# Altium PCB Voltage_Detect_Karen.PcbDoc
Units mm, origin at the board's own origin, x right, y up, seen from the top; angles counter-clockwise.
Board outline 112 x 59 mm, 2 copper layers (Top Layer, Bottom Layer); 87 components, 62 nets, 238 pads, 65 vias.
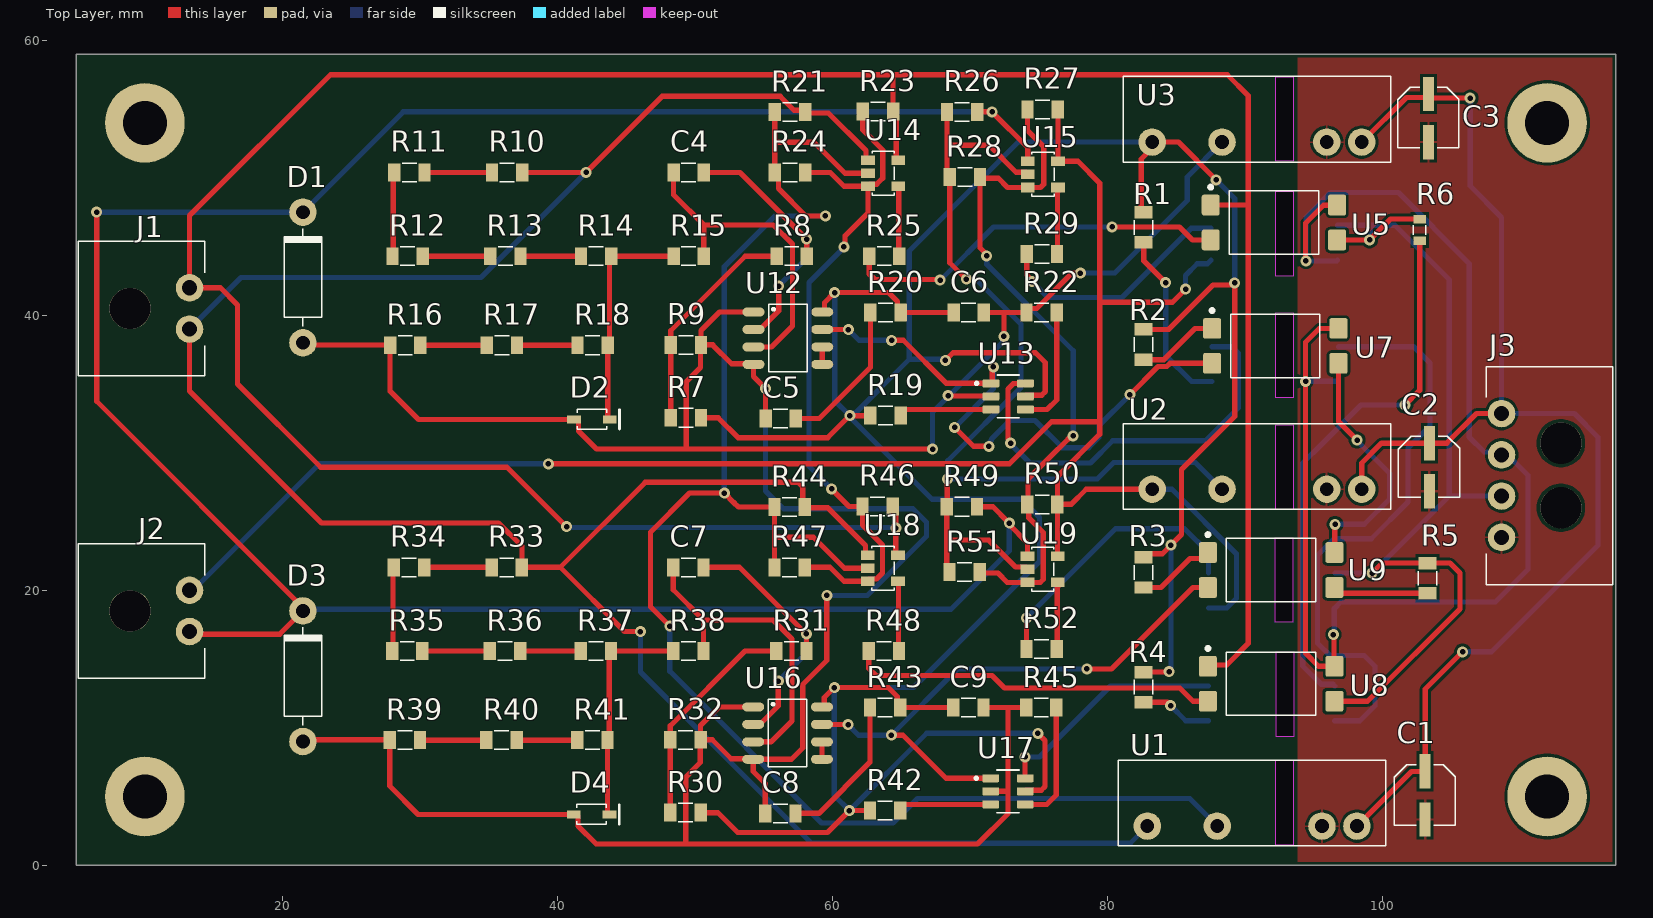
[diagram p0: Top Layer view]
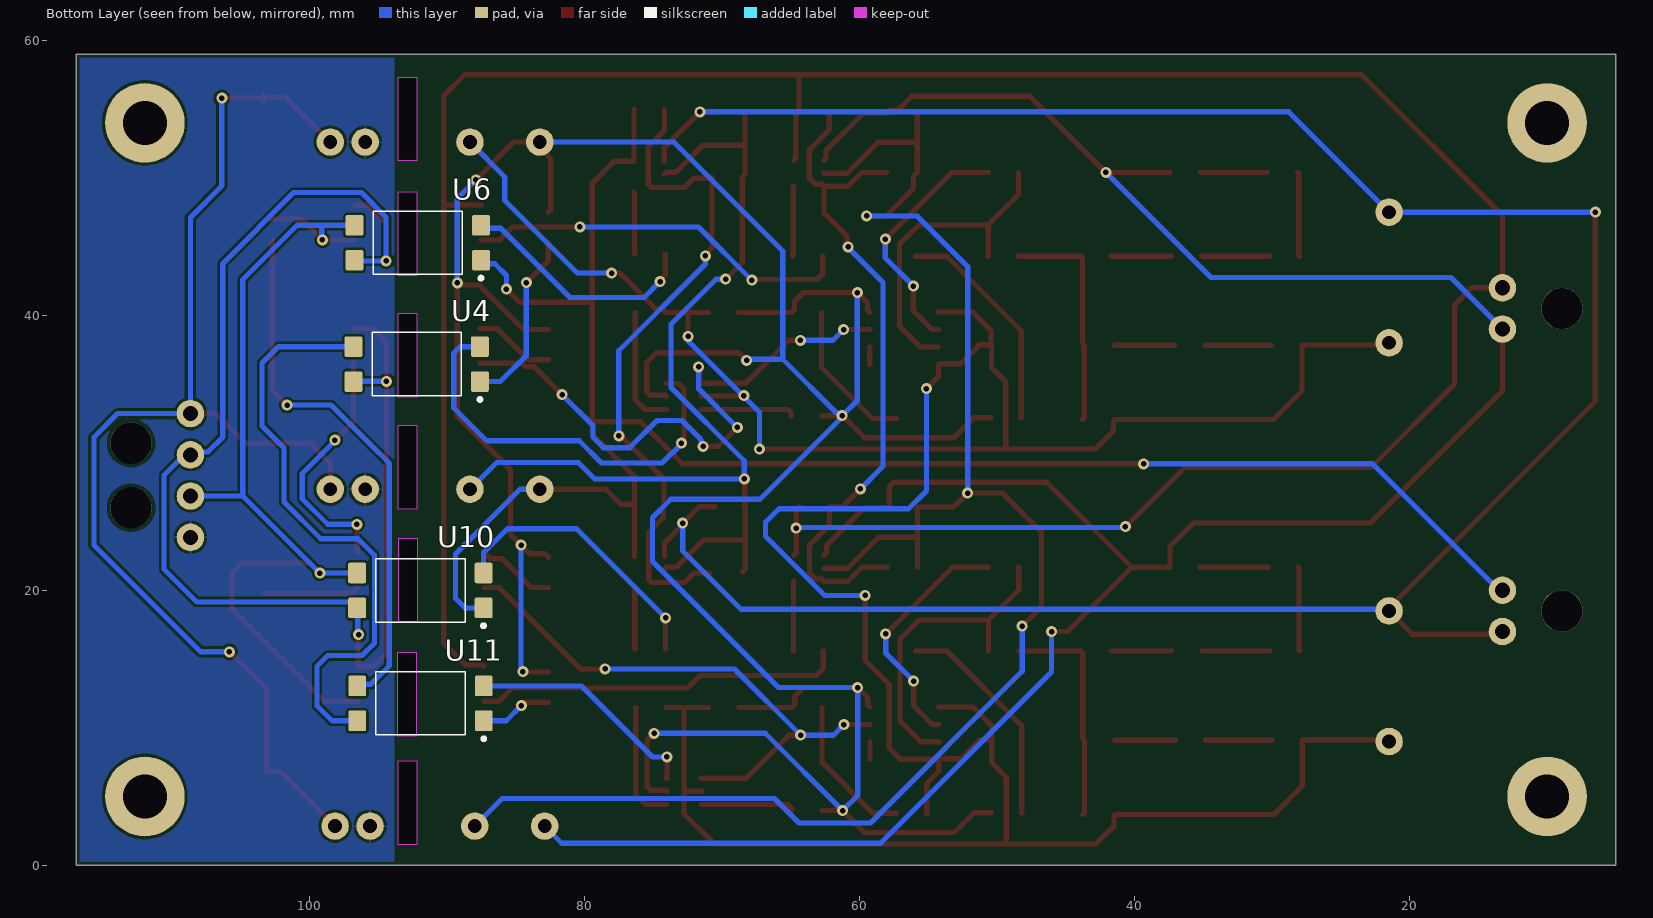
[diagram p1: Bottom Layer view, seen from below]
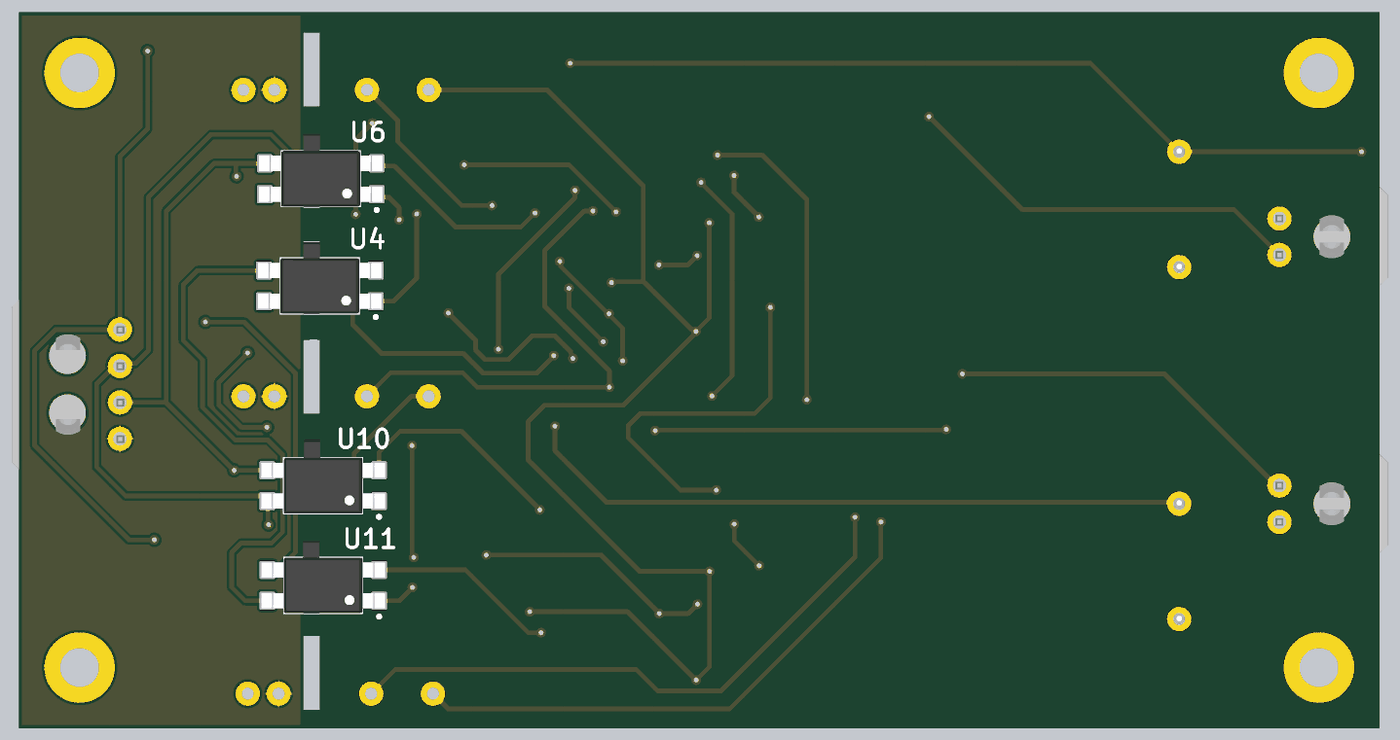
[diagram p2: 3D render of the assembled board from below, using the file's embedded part models]

## Layer stack, top to bottom
Top Solder: solder mask 0.0102, Solder Resist, Dk 3.5
Top Layer: signal copper 0.0356
Dielectric 1: dielectric 0.32, FR-4, Dk 4.8
Bottom Layer: signal copper 0.0356
Bottom Solder: solder mask 0.0102, Solder Resist, Dk 3.5

## Board outline
5,0 5,59 117,59 117,0
cut-out: 92.175,17.7 93.525,17.7 93.525,23.8 92.175,23.8
cut-out: 92.25,9.375 93.6,9.375 93.6,15.475 92.25,15.475
cut-out: 92.225,1.5 93.575,1.5 93.575,7.6 92.225,7.6
cut-out: 92.225,25.9 93.575,25.9 93.575,32 92.225,32
cut-out: 92.225,34.05 93.575,34.05 93.575,40.15 92.225,40.15
cut-out: 92.225,42.875 93.575,42.875 93.575,48.975 92.225,48.975
cut-out: 92.225,51.225 93.575,51.225 93.575,57.325 92.225,57.325

## Design rules (kind name [scope] priority, off if disabled: settings)
AcuteAngle [All] p1: minimum=3.50000000000000E+0001 checktracksonly=FALSE
BoardOutlineClearance "BoardOutlineClearance 1" [All] p1: gap=0.25 ignorepadtopadclearanceinfootprint=FALSE except(0: Arc-SplitContinuation Track-SplitContinuation SMDPad-SplitContinuation THPad-SplitContinuation Via-SplitContinuation Fill-SplitContinuation Poly-SplitContinuation Region-SplitContinuation Text-SplitContinuation) // Milling
Clearance "Clearance-1 1/2 Oz" [All] p1: gap=0.125 ignorepadtopadclearanceinfootprint=FALSE except(0.2: Arc-Fill Arc-Poly Track-Fill Track-Poly SMDPad-SMDPad SMDPad-Fill SMDPad-Poly THPad-Fill THPad-Poly Via-Fill Via-Poly Fill-Fill Fill-Poly Poly-Poly Poly-Region Poly-Text; 0.25: Arc-Hole Track-Hole SMDPad-Hole THPad-Hole Via-Hole Fill-Hole Poly-Hole Region-Hole Text-Hole) // Standart
ComponentClearance [All] p1: gap=0.1 collisioncheckmode=3 verticalgap=0.1 showdistances=FALSE
DiffPairsRouting "DiffPairsRouting 1/2 Oz" [All] p1: maxlimit=0.254 minlimit=0.125 mostfreqgap=0.254 toplayer_minwidth=0.125 toplayer_maxwidth=0.381 toplayer_prefwidth=0.381 bottomlayer_minwidth=0.125 bottomlayer_maxwidth=0.381 bottomlayer_prefwidth=0.381 maxuncoupledlength=12.7
HoleSize "Minimum HoleSize" [IsPad] p1: absolutevalues=TRUE maxlimit=5.9 minlimit=0.6 maxpercent=80.000 minpercent=20.000
HoleSize "Minimum HoleSize VIA 1" [IsVia] p2: absolutevalues=TRUE maxlimit=5.9 minlimit=0.3 maxpercent=80.000 minpercent=20.000 // Standart
HoleToHoleClearance Hole2HoleClearance [All] p1: gap=0.25 allowstackedmicrovias=FALSE
MinimumAnnularRing "Minimum AR VIA Standart" [All] p1: minimumring=0.15
MinimumAnnularRing "Minimum AR PAD Standart" [All] p2: minimumring=0.2
MinimumSolderMaskSliver "SolderMask Bridge Standart" [All] p1: minsoldermaskwidth=0.15 // All Masks
PlaneClearance "PlaneClearance-1 1/2 Oz" [All] p1: clearance=0.2 // Standart
PlaneConnect "TermalConnect-1 1/2 Oz" [All] p1: planeconnectstyle=Relief reliefexpansion=0.2 reliefentries=4 reliefconductorwidth=0.2 reliefairgap=0.2 // Standart
PolygonConnect "PolygonConnect-1 1/2 Oz" [All] p1: thpad.connectstyle=Relief thpad.reliefconductorwidth=0.15 thpad.reliefentries=4 thpad.polygonreliefangle="90 Angle" thpad.airgapwidth=0.2 smdpad.connectstyle=Relief smdpad.reliefconductorwidth=0.2 smdpad.reliefentries=4 smdpad.polygonreliefangle="90 Angle" smdpad.airgapwidth=0.2 via.connectstyle=Direct via.reliefconductorwidth=0.254 via.reliefentries=4 via.polygonreliefangle="90 Angle" via.airgapwidth=0.254 // Standart
RoomDefinition Primary [InComponentClass('Primary')] p1: confinementstyle=ConfineIn formatcopy=TRUE lockcomponents=FALSE outline 17.585,29.21 80.608,29.21 80.608,56.407 17.585,56.407
RoomDefinition Secondary [InComponentClass('Secondary')] p2: confinementstyle=ConfineIn formatcopy=TRUE lockcomponents=FALSE outline 17.56,0.485 80.583,0.485 80.583,27.682 17.56,27.682
RoutingCorners [All] p1 off: cornerstyle=45-Degree minsetback=2.54 maxsetback=2.54
RoutingVias [All] p1: holewidth=0.4 width=0.8 viastyle="Through Hole" minholewidth=0.3 minwidth=0.6 maxholewidth=5.9 maxwidth=8.9
SilkToSilkClearance Silk2SilkClearance [All] p1 off: silktosilkclearance=0.15
SilkToSolderMaskClearance Silk2SolderMaskClearance [IsPad] p1 off: minsilkscreentomaskgap=0.15 clearancetoexposedcopper=TRUE
SolderMaskExpansion SolderMaskExpansion-1 [All] p1: expansion=0.05 istentingtop=FALSE // Standart
UnRoutedNet [All] p1: checkbadconnections=TRUE
Width "Width 1/2 Oz" [All] p1: maxlimit=10 minlimit=0.125 preferedwidth=0.254 checkconnectedcopper=TRUE
19 further rules are at their usual default settings.

## Classes and differential pairs
channel class "Voltage detectV2": Primary Secondary
component class Sheet1: C1 C2 C3 J1 J2 J3 R1 R2 R3 R4 R5 R6 U1 U2 U3 U4 U5 U6 U7 U8 U9 U10 U11
component class Secondary: C7 C8 C9 D3 D4 R30 R31 R32 R33 R34 R35 R36 R37 R38 R39 R40 R41 R42 R43 R44 R45 R46 R47 R48 R49 R50 R51 R52 U16 U17 U18 U19
component class Primary: C4 C5 C6 D1 D2 R7 R8 R9 R10 R11 R12 R13 R14 R15 R16 R17 R18 R19 R20 R21 R22 R23 R24 R25 R26 R27 R28 R29 U12 U13 U14 U15

## Components (designator, comment, footprint, x,y, rotation, side; value= is the part's Value field where it differs from the comment)
C1 "4.7uF" "Bar Cap 4x5.4" 103.125,3.325 r180 top (schematic designator C5)
C2 "4.7uF" "Bar Cap 4x5.4" 103.425,27.2 r180 top (schematic designator C6)
C3 "4.7uF" "Bar Cap 4x5.4" 103.375,52.6 r180 top (schematic designator C4)
C4 "10nF" "0805 Capicator" 49.559,50.395 r0 top (schematic designator C1)
C5 "0.1uF" "0805 Capicator" 56.25,32.5 r180 top (schematic designator C2)
C6 "0.1uF" "0805 Capicator" 69.925,40.2 r0 top (schematic designator C3)
C7 "10nF" "0805 Capicator" 49.534,21.67 r0 top (schematic designator C1)
C8 "0.1uF" "0805 Capicator" 56.225,3.775 r180 top (schematic designator C2)
C9 "0.1uF" "0805 Capicator" 69.9,11.475 r0 top (schematic designator C3)
D1 "Diode" DO-41 21.5,38 r90 top
D2 "Zener 12V" sod-323 41.225,32.425 r0 top
D3 "Diode" DO-41 21.5,9 r90 top (schematic designator D1)
D4 "Zener 12V" sod-323 41.2,3.7 r0 top (schematic designator D2)
J1 "Conn2x1" "MolexMicroFit 2x1" 13.25,42 r270 top
J2 "Conn2x1" "MolexMicroFit 2x1" 13.25,20 r270 top
J3 "Conn4x1" "MolexMicroFit 4x1" 108.68,32.85 r90 top
R1 "100R" "0805 Resistor" 82.65,46.4 r90 top (schematic designator R15)
R2 "100R" "0805 Resistor" 82.65,37.875 r90 top (schematic designator R3)
R3 "100R" "0805 Resistor" 82.65,21.3 r90 top (schematic designator R16)
R4 "100R" "0805 Resistor" 82.65,12.95 r90 top (schematic designator R17)
R5 "1k" "0805 Resistor" 103.3,20.875 r90 top (schematic designator R27)
R6 "2.4k" "0603 Resistor" 102.725,46.2 r90 top (schematic designator R28)
R7 "75k" "0805 Resistor" 49.35,32.55 r180 top (schematic designator R1)
R8 "100R" "0805 Resistor" 57.052,44.299 r0 top (schematic designator R2)
R9 "200k" "0805 Resistor" 49.35,37.85 r180 top (schematic designator R4)
R10 "200k" "0805 Resistor" 36.351,50.395 r180 top (schematic designator R5)
R11 "200k" "0805 Resistor" 29.239,50.395 r180 top (schematic designator R6)
R12 "200k" "0805 Resistor" 29.112,44.299 r0 top (schematic designator R7)
R13 "200k" "0805 Resistor" 36.224,44.299 r0 top (schematic designator R8)
R14 "200k" "0805 Resistor" 42.828,44.299 r0 top (schematic designator R9)
R15 "100R" "0805 Resistor" 49.559,44.299 r0 top (schematic designator R10)
R16 "2.4k" "0805 Resistor" 28.942,37.822 r0 top (schematic designator R11)
R17 "24k" "0805 Resistor" 35.97,37.822 r180 top (schematic designator R12)
R18 "24k" "0805 Resistor" 42.574,37.822 r0 top (schematic designator R13)
R19 "1k" "0805 Resistor" 63.875,32.7 r180 top (schematic designator R18)
R20 "1k" "0805 Resistor" 63.875,40.2 r180 top (schematic designator R14)
R21 "1k" "0805 Resistor" 56.925,54.775 r0 top (schematic designator R19)
R22 "1k" "0805 Resistor" 75.225,40.2 r0 top (schematic designator R29)
R23 "1k" "0805 Resistor" 63.325,54.825 r0 top (schematic designator R20)
R24 "1k" "0805 Resistor" 56.925,50.395 r0 top (schematic designator R21)
R25 "1k" "0805 Resistor" 63.783,44.299 r180 top (schematic designator R22)
R26 "1k" "0805 Resistor" 69.45,54.8 r0 top (schematic designator R23)
R27 "1k" "0805 Resistor" 75.3,54.975 r0 top (schematic designator R24)
R28 "1k" "0805 Resistor" 69.65,50.05 r0 top (schematic designator R25)
R29 "1k" "0805 Resistor" 75.25,44.45 r180 top (schematic designator R26)
R30 "75k" "0805 Resistor" 49.325,3.825 r180 top (schematic designator R1)
R31 "100R" "0805 Resistor" 57.027,15.574 r0 top (schematic designator R2)
R32 "200k" "0805 Resistor" 49.325,9.125 r180 top (schematic designator R4)
R33 "200k" "0805 Resistor" 36.326,21.67 r180 top (schematic designator R5)
R34 "200k" "0805 Resistor" 29.214,21.67 r180 top (schematic designator R6)
R35 "200k" "0805 Resistor" 29.087,15.574 r0 top (schematic designator R7)
R36 "200k" "0805 Resistor" 36.199,15.574 r0 top (schematic designator R8)
R37 "200k" "0805 Resistor" 42.803,15.574 r0 top (schematic designator R9)
R38 "100R" "0805 Resistor" 49.534,15.574 r0 top (schematic designator R10)
R39 "2.4k" "0805 Resistor" 28.917,9.097 r0 top (schematic designator R11)
R40 "24k" "0805 Resistor" 35.945,9.097 r180 top (schematic designator R12)
R41 "24k" "0805 Resistor" 42.549,9.097 r0 top (schematic designator R13)
R42 "1k" "0805 Resistor" 63.85,3.975 r180 top (schematic designator R18)
R43 "1k" "0805 Resistor" 63.85,11.475 r180 top (schematic designator R14)
R44 "1k" "0805 Resistor" 56.9,26.05 r0 top (schematic designator R19)
R45 "1k" "0805 Resistor" 75.2,11.475 r0 top (schematic designator R29)
R46 "1k" "0805 Resistor" 63.3,26.1 r0 top (schematic designator R20)
R47 "1k" "0805 Resistor" 56.9,21.67 r0 top (schematic designator R21)
R48 "1k" "0805 Resistor" 63.758,15.574 r180 top (schematic designator R22)
R49 "1k" "0805 Resistor" 69.425,26.075 r0 top (schematic designator R23)
R50 "1k" "0805 Resistor" 75.275,26.25 r0 top (schematic designator R24)
R51 "1k" "0805 Resistor" 69.625,21.325 r0 top (schematic designator R25)
R52 "1k" "0805 Resistor" 75.225,15.725 r180 top (schematic designator R26)
U1 "DC/DC" "SIP7 TMV" 80.77,1.62 r270 top
U2 "DC/DC" "SIP7 TMV" 81.12,26.12 r270 top
U3 "DC/DC" "SIP7 TMV" 81.12,51.37 r270 top (schematic designator U4)
U4 "Opt" FAIR-MDIP-4_V 92.225,36.45 r0 bottom (schematic designator U7)
U5 "Opt" FAIR-MDIP-4_V 92.125,46.75 r0 top (schematic designator U9)
U6 "Opt" FAIR-MDIP-4_V 92.15,45.275 r0 bottom (schematic designator U10)
U7 "Opt" FAIR-MDIP-4_V 92.225,37.775 r0 top (schematic designator U6)
U8 "Opt" FAIR-MDIP-4_V 91.925,13.2 r0 top (schematic designator U13)
U9 "Opt" FAIR-MDIP-4_V 91.925,21.475 r0 top (schematic designator U12)
U10 "Opt" FAIR-MDIP-4_V 91.96,19.99 r0 bottom (schematic designator U14)
U11 "Opt" FAIR-MDIP-4_V 91.95,11.775 r0 bottom (schematic designator U15)
U12 "Comp" SOIC-8 54.275,40.24 r0 top (schematic designator U3)
U13 "Inv" SOT236 72.8,34.1 r0 top (schematic designator U5)
U14 "Comparator [LMV]" SOT-23-5 62.599,50.329 r270 top (schematic designator U8)
U15 "Comparator [LMV]" SOT-23-5 74.225,50.25 r270 top (schematic designator U11)
U16 "Comp" SOIC-8 54.25,11.515 r0 top (schematic designator U3)
U17 "Inv" SOT236 72.775,5.375 r0 top (schematic designator U5)
U18 "Comparator [LMV]" SOT-23-5 62.574,21.604 r270 top (schematic designator U8)
U19 "Comparator [LMV]" SOT-23-5 74.2,21.525 r270 top (schematic designator U11)

## Footprints (in the part's own frame and the unit in brackets; to place one, negate y for a bottom-side part, rotate by r counter-clockwise, add the part's x,y. Pads: shape width x height; smd on the part's side, far side on the other; paste and mask are expansions set on the pad)
"0603 Resistor" [mm]
  rect 0.6x0.9 smd: 1(-0.78,0) 2(0.78,0)
  silkscreen extent -0.35,-0.45 0.35,0.45, body extent -0.85,-0.45 0.85,0.45, height 0.55
"0805 Capicator" [mm]
  rect 0.9x1.3 smd: 1(-1.1,0) 2(1.1,0)
  silkscreen extent -0.52,-0.68 0.53,0.67, body extent -1.05,-0.67 1.05,0.68, height 0.75
"0805 Resistor" [mm]
  rect 0.9x1.3 smd: 1(-1.1,0) 2(1.1,0)
  silkscreen extent -0.53,-0.67 0.53,0.67, body extent -1.05,-0.67 1.05,0.68, height 0.6
"Bar Cap 4x5.4" [mm]
  rect 0.8x2.5 smd: 1(0,0) 2(0,-3.5)
  silkscreen extent -2.2,-4 2.25,0.42, body extent -2.15,-4.3 2.15,0.7, height 5.4
DO-41 [mm]
  round 2 hole 1: 1(0,0) 2(9.5,0)
  silkscreen extent 1.2,-1.38 8.3,1.38, body extent -0.39,-1.35 9.99,1.35, height 2.83
FAIR-MDIP-4_V [mm]
  rrect20% 1.3x1.5 smd: 1(-4.6,1.27) 2(-4.6,-1.27) 3(4.6,-1.27) 4(4.6,1.27)
  silkscreen extent -4.72,-2.3 3.25,2.69, body extent -5.08,-2.3 5.08,2.3, height 3.85
"MolexMicroFit 2x1" [mm]
  round 2 hole 1.1: 1(3,0) 2(0,0)
  round 3 hole 3: A(1.5,-4.32)
  silkscreen extent -3.4,-8.1 6.4,1.1, body extent -3.33,-8.9 6.32,1, height 5.64
"MolexMicroFit 4x1" [mm]
  round 2 hole 1.1: 1(0,0) 2(-3,0) 3(-6,0) 4(-9,0)
  round 3 hole 3: A(-6.85,-4.32) A(-2.15,-4.32)
  silkscreen extent -12.45,-8.1 3.4,1.1, body extent -12.35,-8.87 3.3,1.03, height 5.64
"SIP7 TMV" [mm]
  round 2 hole 1: 1(-1.23,17.39) 2(-1.23,14.85) 4(-1.23,7.23) 6(-1.23,2.15)
  silkscreen extent -6.01,0.04 0.22,19.49, body extent -5.93,0.12 0.16,19.42, height 0.25
sod-323 [mm]
  rect 1x0.6 smd: 1(0,0) 2(2.6,0)
  silkscreen extent 0.22,-0.72 3.3,0.72, body extent 0.03,-0.68 2.63,0.67, height 1.1
SOIC-8 [mm]
  oval 1.6x0.65 smd: 1(0,0) 2(0,-1.27) 3(0,-2.54) 4(0,-3.81) 5(5,-3.81) 6(5,-2.54) 7(5,-1.27) 8(5,0)
  silkscreen extent 1.1,-4.35 3.9,0.55, body extent -0.36,-4.35 5.41,0.55, height 1.45
SOT236 [mm]
  rrect25% 1.21x0.58 smd: 1(-1.255,0.95) 2(-1.255,0) 3(-1.255,-0.95) 4(1.255,-0.95) 5(1.255,0) 6(1.255,0.95)
  silkscreen extent -2.4,-1.56 0.8,1.56, body extent -1.4,-1.45 1.4,1.45, height 1.45
SOT-23-5 [mm]
  rect 0.7x1 smd mask+0.045: 1(-0.95,0) 2(0,0) 3(0.95,0) 4(0.95,2.2) 5(-0.95,2.2)
  silkscreen extent -1.6,0.3 1.6,1.93, body extent -1.5,-0.15 1.5,2.35, height 1.1

## Part data
C1 C2 C3: library part "Cap Pol 4.7uF", "ECAP SMD,  35V, 105°C", Manufacturer=Epcos, Part Number=B41121A7475M000, ComponentLink1Description=Chip&Dip, ComponentLink1URL=https://www.chipdip.ru/product/b41121a7475m000, Type=Capacitor
C4 C7: library part "Cap 10nF (0805)", "0805 X7R 10nF 100V 10%", Manufacturer="Murata Manufacturing", Part Number=GRM21BR72A103KA01L, ComponentLink1Description=Chip&Dip, ComponentLink1URL=https://www.chipdip.ru/product/grm21br72a103ka01l, Type=Capacitor
C5 C6 C8 C9: library part "Cap 0.1uF (0805)", "0.1uF X7R 25V 10% 0805", Manufacturer="Murata Manufacturing", Part Number=GRM21BR71E104KA01L, ComponentLink1Description=Chip&Dip, ComponentLink1URL=https://www.chipdip.ru/product/grm21br71e104ka01l, Type=Capacitor
D1 D3: library part "Diode HV [EM5]", "Highg voltage diode - 2000V", Manufacturer=China, Part Number=EM518, ComponentLink1Description=ChipDip, ComponentLink1URL=https://www.chipdip.ru/product/em518, ComponentLink2Description=Datasheet, ComponentLink2URL=https://static.chipdip.ru/lib/004/DOC001004767.pdf, Type=Diode
D2 D4: library part "Zener Diode 12V", "300mW", Manufacturer="NXP Semiconductor", Part Number=BZX384-C12,115, ComponentLink1Description=Chip&Dip, ComponentLink1URL=https://www.chipdip.ru/product/bzx384-c12.115, ComponentLink2Description=DataSheet, ComponentLink2URL=https://static.chipdip.ru/lib/583/DOC001583013.pdf, Type=Diode
J1 J2: library part "Conn 2 [MicroFit]", "Micro-Fit 3.0 Right-Angle Header, 3.00mm Pitch, Single Row, 2 Circuits, with Snap-in Plastic Peg PCB Lock, Tin, Glow-Wire Capable, Black", Manufacturer=Molex, Part Number=436500200, ComponentLink1Description=Molex, ComponentLink1URL=https://www.molex.com/molex/products/part-detail/pcb_headers/0436500200, Type=Connector
J3: library part "Conn 4 [MicroFit]", "Micro-Fit 3.0 Right-Angle Header, 3.00mm Pitch, Single Row, 4 Circuits, with Snap-in Plastic Peg PCB Lock, Tin, Glow-Wire Capable, Black", Manufacturer=Molex, Part Number=436500400, ComponentLink1Description=Molex, ComponentLink1URL=https://www.molex.com/molex/products/part-detail/pcb_headers/0436500400, Type=Connector
R1 R2 R3 R4 R8 R15 R31 R38: library part "Res 100R (0805)", "0.125W 0805 100R, 1%", Manufacturer=Taiwan, Part Number=RC0805FR-07100RL, ComponentLink1Description=Chip&Dip, ComponentLink1URL=https://www.chipdip.ru/product0/9000079462, Type=Resistor
R5 R19 R20 R21 R22 R23 R24 R25 R26 R27 R28 R29 R42 R43 R44 R45 R46 R47 R48 R49 R50 R51 R52: library part "Res 1k (0805)", "0.125W 0805 1k, 1%", Manufacturer=Taiwan, Part Number=RC0805FR-071KL, ComponentLink1Description=Chip&Dip, ComponentLink1URL=https://www.chipdip.ru/product0/9000079486, Type=Resistor
R6: library part "Res 2.4k (0603)", "0.1W 0603 2.4k, 1%", Manufacturer=Taiwan, Part Number=RC0603FR-072K4L, ComponentLink1Description=Chip&Dip, ComponentLink1URL=https://www.chipdip.ru/product0/9000079721, Type=Resistor
R7 R30: library part "Res 75k (0805)", "0.125W 0805 75k, 1%", Manufacturer=Taiwan, Part Number=RC0805FR-0775KL, ComponentLink1Description=Chip&Dip, ComponentLink1URL=https://www.chipdip.ru/product0/9000079535, Type=Resistor
R9 R10 R11 R12 R13 R14 R32 R33 R34 R35 R36 R37: library part "Res 200k (0805)", "0.125W 0805 200k, 1%", Manufacturer=Taiwan, Part Number=RC0805FK-07200KL, ComponentLink1Description=Chip&Dip, ComponentLink1URL=https://www.chipdip.ru/product0/914213016, Type=Resistor
R16 R39: library part "Res 2.4k (0805)", "0.125W 0805 2.4k, 1%", Manufacturer=Taiwan, Part Number=RC0805FR-072K4L, ComponentLink1Description=Chip&Dip, ComponentLink1URL=https://www.chipdip.ru/product0/9000079495, Type=Resistor
R17 R18 R40 R41: library part "Res 24k (0805)", "0.125W 0805 24k, 1%", Manufacturer=Taiwan, Part Number=RC0805FR-0724KL, ComponentLink1Description=Chip&Dip, ComponentLink1URL=https://www.chipdip.ru/product0/9000079523, Type=Resistor
U1 U2 U3: library part "DC/DC Isolated [TMH]", "The TMV series are ultra miniature, isolated 1 Watt DC/DC-converters in a Single-in-Line  package  (SIP)", ComponentLink1Description=Chip&Dip, ComponentLink2Description="New link", ComponentLink2URL=https://static.chipdip.ru/lib/005/DOC001005854.pdf
U4 U5 U6 U7 U8 U9 U10 U11: library part "Optocoupler [FOD817B]", "Phototransistor Optocoupler, 4 us Rise, 3 us Fall, 5000 Vrms, -55 to 110 degC, 4-Pin MDIP, RoHS, Tape and Reel", Manufacturer="ON Semiconductor", Part Nomber=FOD817B, ComponentLink1Description=Chip&Dip, ComponentLink1URL=https://www.chipdip.ru/product/fod817b, ComponentLink2Description=DataSheet, ComponentLink2URL=https://static.chipdip.ru/lib/297/DOC000297284.pdf
U12 U16: library part "Comparator [LM3]", "Differential comparator with strobes", Manufacturer="Texas Instruments", Part Number=LM311DR, ComponentLink1Description=DataSheet, ComponentLink1URL=https://static.chipdip.ru/lib/222/DOC000222396.pdf, ComponentLink2Description=Chip&Dip, ComponentLink2URL=https://www.chipdip.ru/product/lm311d, Type=IC
U13 U17: library part "Inventer (SN74)", "Dual inverter, 1.65-5.5V", Manufacturer="Texas Instruments", Part Number=SN74LVC2G04DBVR, ComponentLink1Description=Chip&Dip, ComponentLink1URL=https://www.chipdip.ru/product/sn74lvc2g04dbvr-2, ComponentLink2Description=DataSheet, ComponentLink2URL=https://static.chipdip.ru/lib/021/DOC001021810.pdf, Type=IC
U14 U15 U18 U19: "Differential comparator with strobes", Manufacturer="Texas Instruments", Part Number=LMV331M5/NOPB, ComponentLink1Description=DataSheet, ComponentLink1URL=https://static.chipdip.ru/lib/291/DOC000291302.pdf, ComponentLink2Description=Chip&Dip, ComponentLink2URL=https://www.chipdip.ru/product/lmv331m5-nopb, Type=IC

## Free pads (board coordinates)
  round 5.8 hole 3.2: A(10,5) A(10,54) A(112,5) A(112,54)

## Via types
v1: diameter 0.8, hole 0.4, Top Layer to Bottom Layer, tented both sides, 65 vias

## Nets (pads, with @x,y where several pads share a name; then routed paths per layer and width w, separated by ;. In a path a pad name is that pad's centre, name@x,y a point inside that pad or via, vN(x,y) a via of type N, cw(c..) or ccw(c..) an arc to the next point about the centre after c; other vN are vias at no path point)
5V: C6.1 C9.1 R1.2 R2.2 R3.2 R4.2 R7.1 R19.2 R20.1 R30.1 R42.2 R43.1 U3.6 U12.8 U13.5 U16.8 U17.5 | length 239.7
  Top Layer w0.381: R30.1 51.675,3.825 53.125,2.375 59.65,2.375 v1(61.25,3.975) R42.2 ; R7.1 51.7,32.55 53.15,31.1 59.675,31.1 v1(61.275,32.7) R19.2 ; U16.8 59.289,11.515 59.413,11.639 59.413,12.188 v1(60.15,12.925) 64.075,12.925 64.725,12.275 64.725,11.7 R43.1 C9.1 ; U12.8 59.314,40.24 59.438,40.364 59.438,40.913 v1(60.175,41.65) 64.1,41.65 64.75,41 64.75,40.425 R20.1 C6.1 ; v1(68.225,36.725) 68.775,37.275 74.777,37.275 75.5,36.552 75.5,34.45 75.231,34.181 74.136,34.181 U13.5 ; U17.5 74.111,5.456 75.206,5.456 75.475,5.725 75.475,9.075 v1(74.95,9.6) ; R1.2@82.475,47.675 82.475,51.367 83.27,52.162 U3.6 85.178,52.6 v1(87.922,49.856) ; R1.2@82.613,47.538 R1.2 ; R4.2 82.662,14.063 84.488,14.063 v1(84.5,14.075) ; R3.2 82.91,22.66 84.01,22.66 v1(84.638,23.288) 85.4,24.05 85.4,28.775 89.275,32.65 v1(89.275,42.35) ; R2.2 84.467,38.975 87.692,42.2 v1@89.05,42.2
  Bottom Layer w0.381: v1(60.175,41.65) 60.175,33.8 v1(61.275,32.7) ; v1(68.225,36.725) 68.15,36.8 65.6,36.8 ; v1(74.95,9.6) 66.875,9.6 v1(61.25,3.975) 60.15,5.075 v1(60.15,12.925) 65.9,12.925 75.075,22.1 75.075,25.3 73.75,26.625 67.25,26.625 61.275,32.6 v1(61.275,32.7) ; U3.6 73.525,52.6 65.6,44.675 65.6,36.8 ; v1(84.5,14.075) 84.5,14.188 84.638,14.326 v1(84.638,23.288) ; v1(87.922,49.856) 89.275,48.503 v1(89.275,42.35) ; v1(61.275,32.7) 61.388,32.7 61.582,32.893 61.693,32.893 65.6,36.8
"24V IN": C1.2 C2.2 C3.2 J3.1 U1.1 U2.1 U3.1 | length 92.1
  Top Layer w0.381: U1.1 102.135,6.825 C1.2 103.125,12.8 v1(105.85,15.525) ; U2.1 98.51,29.26 99.95,30.7 C2.2 104.7,30.7 106.85,32.85 J3.1 ; U3.1 101.76,55.85 103.165,55.85 C3.2@103.415,55.6 ; C3.2 103.375,56.01 103.585,55.8 v1(106.4,55.8)
  Bottom Layer w0.381: v1(105.85,15.525) 107.95,15.525 115.7,23.275 115.7,31.125 113.975,32.85 J3.1 108.68,47.12 106.4,49.4 v1(106.4,55.8)
Con1_1: J1.2 R23.2 R46.2 U5.1 U8.1 U14.5 U18.5 | length 205.4
  Top Layer w0.381: v1(40.675,24.625) 36.35,28.95 22.8,28.95 16.75,35 16.75,40.75 15.5,42 J1.2 13.25,47.25 23.5,57.5 64.425,57.5 ; R46.2 64.625,25.875 64.625,22.703 U18.5 ; U14.5 64.65,51.428 64.65,54.6 R23.2 64.425,57.5 ; U8.1 87.425,14.57 88.695,14.57 90.25,16.125 90.25,48.02 ; U5.1 90.25,48.02 ; 64.425,57.5 88.725,57.5 90.25,55.975 90.25,48.02
  Bottom Layer w0.381: v1(40.675,24.625) 40.725,24.575 64.575,24.575 v1(64.625,24.525)
Con1_2: J1.1 R10.1 R21.2 R33.1 R44.2 U1.6 U14.1 U18.1 | length 182.6
  Top Layer w0.381: J1.1 13.25,34.5 22.85,24.9 35.725,24.9 37.426,23.199 R33.1 40.22,21.67 ; R10.1 v1(42.095,50.395) 47.625,55.925 56.221,55.925 57.227,54.92 57.88,54.92 57.88,54.72 59.705,54.72 62.448,51.977 62.448,51.43 U14.1 ; v1(46.05,17) 44.89,17 40.22,21.67 ; U18.1 62.423,22.705 62.423,23.252 59.68,25.995 57.855,25.995 57.855,27.52 57.525,27.85 46.4,27.85 40.22,21.67
  Bottom Layer w0.381: J1.1 17,42.75 34.45,42.75 v1(42.095,50.395) ; v1(46.05,17) 46.05,14.05 58.5,1.6 81.67,1.6 U1.6
Con2_1: D1.2 D3.2 J2.1 R26.2 R49.2 U15.1 U19.1 | length 179.2
  Top Layer w0.381: v1(6.5,47.5) 6.5,33.75 21.625,18.625 19.81,16.81 J2.1@13.25,16.81 ; R49.2 71.688,26.075 72.788,24.975 72.875,24.975 72.875,24.775 74.2,23.45 U19.1 ; R26.2 v1(71.625,54.8) 74.225,52.2 U15.1
  Bottom Layer w0.381: v1(6.5,47.5) D1.2 28.8,54.8 v1(71.625,54.8) ; D3.2@21.5,18.622 68.635,18.622 72.875,22.862 v1(72.875,24.888)
Con2_2: J2.2 R27.2 R50.2 U2.6 U6.1 U10.1 U15.5 U19.5 | length 138.2
  Top Layer w0.381: v1(39.35,29.2) 72.9,29.2 75.966,32.266 79.45,32.266 ; R50.2 R50.2@76.387,26.25 ; U19.5@76.387,22.475 R50.2@76.387,26.25 ; R27.2 76.412,54.962 76.412,51.2 U15.5 77.875,51.2 79.45,49.625 79.45,40.946 ; U2.6 78.475,27.35 77.375,26.25 R50.2@76.387,26.25 ; v1(85.7,41.9) 84.746,40.946 79.45,40.946 ; R50.2@76.387,26.25 76.387,28.286 79.45,31.348 79.45,32.266 ; 79.45,32.266 79.45,40.946
  Bottom Layer w0.381: J2.2@13.236,19.736 22.7,29.2 v1(39.35,29.2) ; U2.6 84.7,27.35 89.4,22.65 89.4,19.425 88.695,18.72 U10.1 ; v1(85.7,41.9) 85.7,42.9 86.552,43.752 87.297,43.752 U6.1
"DC/DC GND": C1.1 C2.1 C3.1 J3.4 U1.2 U2.2 U3.2
GND: C5.2 C6.2 C8.2 C9.2 D1.1 D2.1 D3.1 D4.1 R9.1 R16.1 R22.1 R32.1 R39.1 R45.1 U3.4 U12.1 U12.4 U13.2 U16.1 U16.4 U17.2 | length 250.1
  Top Layer w0.381: D3.1@21.5,9.122 27.792,9.122 R39.1 27.817,5.758 29.875,3.7 D4.1 41.4,3.7 41.51,3.59 41.51,2.865 42.831,1.544 49.35,1.544 70.569,1.544 72.775,3.75 72.775,5.375 ; D1.1 21.653,37.847 27.817,37.847 R16.1 27.842,34.483 29.9,32.425 D2.1 41.425,32.425 41.535,32.315 41.535,31.59 42.856,30.269 49.375,30.269 v1@67.3,30.269 ; 49.35,1.575 49.35,6.425 50.4,7.475 50.4,9.1 R32.1 ; 49.375,30.3 49.375,35.15 50.425,36.2 50.425,37.825 R9.1 ; U16.1 51.765,11.515 50.425,10.175 R32.1 ; U12.1 51.79,40.24 50.45,38.9 R9.1 ; C8.2 55.125,5.95 54.25,6.825 U16.4 ; C5.2 v1(55.15,34.675) 54.275,35.55 U12.4 54.23,36.475 52.675,36.475 51.3,37.85 R9.1 ; v1(59.6,19.625) 59.6,14.893 57.85,13.143 57.85,8.525 57.03,7.705 U16.4 ; v1(68.425,34.15) 68.45,34.125 71.52,34.125 U13.2 ; C9.2 72.775,11.475 ; C6.2 72.5,40.2 ; U17.2 72.775,5.375 ; v1(72.475,38.475) 72.5,38.5 72.5,40.2 ; R45.1 72.775,11.475 ; v1(78.05,43.075) 78.044,43.069 77.444,43.069 74.875,40.5 74.385,40.5 74.125,40.24 R22.1 72.8,40.2 72.5,40.2 ; R32.1 51.275,9.125 52.65,7.75 54.205,7.75 U16.4 ; 72.775,5.375 72.775,11.475
  Bottom Layer w0.381: v1(55.15,34.675) 55.15,27.225 56.45,25.925 65.875,25.925 66.85,24.95 66.85,23.925 62.55,19.625 v1(59.6,19.625) ; v1(67.3,30.275) 67.3,32.95 72.395,38.045 72.395,38.395 v1(72.475,38.475) ; v1(78.05,43.075) 80.55,43.075 85.818,48.343 85.818,50.068 U3.4
GND_1: R26.1 R28.1 R49.1 R51.1 U2.4 U15.2 U19.2 | length 73.2
  Top Layer w0.381: R26.1 68.35,52.375 ; v1(68.4,28.1) 68.362,28.062 68.362,26.112 R49.1 68.325,23.65 ; R51.1 68.325,21.525 68.325,23.65 ; v1(69.75,42.625) 68.55,43.825 R28.1 68.35,50.25 68.35,52.375 ; U19.2 74.041,21.684 73.34,21.684 71.375,23.65 68.325,23.65 ; U15.2 74.066,50.409 73.365,50.409 71.4,52.375 68.35,52.375
  Bottom Layer w0.381: v1(69.75,42.625) 70.45,42.625 73.725,39.35 73.725,34.75 68.4,29.425 v1(68.4,28.1) 79.275,28.1 80.475,29.3 86.4,29.3 U2.4
GND_2: R21.1 R24.1 R44.1 R47.1 U1.4 U14.2 U18.2 | length 122.3
  Top Layer w0.381: v1(48.181,17.393) 46.775,18.8 46.775,24.225 49.625,27.075 v1(52.15,27.075) 52.865,26.36 53.175,26.05 R44.1 55.8,23.86 ; R47.1 55.8,23.86 ; R21.1 55.825,52.585 ; v1(59.5,47.225) 58.075,47.225 56.085,49.215 56.085,50.136 R24.1 55.825,52.585 ; U18.2 60.896,21.604 58.64,23.86 55.8,23.86 ; U14.2 60.921,50.329 58.665,52.585 55.825,52.585
  Bottom Layer w0.381: v1(48.181,17.393) 48.181,14.119 59.225,3.075 64.425,3.075 66.2,4.85 86,4.85 U1.4 ; v1(52.15,27.075) 52.15,43.55 55.825,47.225 v1(59.5,47.225)
NetC4_1: C4.1 R15.2 U12.3 | length 23.4
  Top Layer w0.381: C4.1 48.459,48.766 50.659,46.566 ; R15.2 50.659,46.566 ; U12.3 55.575,37.7 57.1,39.225 57.1,45.175 55.709,46.566 50.659,46.566
NetC4_2: C4.2 R8.2 U12.2 | length 26
  Top Layer w0.381: C4.2 53.278,50.395 ; U12.2 54.75,38.97 56.1,40.32 v1(56.1,42.125) ; R8.2 v1@58.152,45.521 ; 53.278,50.395 58.133,45.539 53.278,50.395
  Bottom Layer w0.381: v1(56.1,42.125) 58.14,44.165 v1(58.14,45.546)
NetC5_1: C5.1 R20.2 | length 10.9
  Top Layer w0.381: C5.1 59.05,32.5 62.775,36.225 R20.2
NetC7_1: C7.1 R38.2 U16.3 | length 23.4
  Top Layer w0.381: C7.1 48.434,20.041 50.634,17.841 ; R38.2 50.634,17.841 ; U16.3 55.55,8.975 57.075,10.5 57.075,16.45 55.684,17.841 50.634,17.841
NetC7_2: C7.2 R31.2 U16.2 | length 26
  Top Layer w0.381: C7.2 53.252,21.67 ; U16.2 54.725,10.245 56.075,11.595 v1(56.075,13.4) ; R31.2 v1@58.127,16.795 ; 53.252,21.67 58.108,16.814 53.252,21.67
  Bottom Layer w0.381: v1(56.075,13.4) 58.115,15.44 v1(58.115,16.821)
NetC8_1: C8.1 R43.2 | length 10.9
  Top Layer w0.381: C8.1 59.025,3.775 62.75,7.5 R43.2
NetD2_2: D2.2 R14.2 R15.1 R18.2 | length 16.6
  Top Layer w0.381: D2.2 43.783,32.425 43.674,32.534 R18.2 43.801,37.949 43.801,44.172 R14.2 R15.1
NetD4_2: D4.2 R37.2 R38.1 R41.2 | length 16.6
  Top Layer w0.381: D4.2 43.758,3.7 43.649,3.809 R41.2 43.776,9.224 43.776,15.447 R37.2 R38.1
NetR1_1: R1.1 U4.1 | length 13
  Top Layer w0.381: R1.1 82.65,43.975 v1(84.25,42.375)
  Bottom Layer w0.381: v1(84.25,42.375) 84.25,37.075 86.145,35.18 U4.1
NetR2_1: R2.1 U7.1 | length 5.9
  Top Layer w0.381: R2.1 84.125,36.775 86.395,39.045 U7.1
NetR3_1: R3.1 U9.1 | length 5.7
  Top Layer w0.381: R3.1 83.9,20.2 86.015,22.315 86.896,22.315 U9.1
NetR4_1: R4.1 U11.1 | length 5.3
  Top Layer w0.381: R4.1 84.364,11.85 v1(84.606,11.608)
  Bottom Layer w0.381: v1(84.606,11.608) 85.709,10.505 U11.1
NetR5_1: R5.1 U9.3 | length 7
  Top Layer w0.381: U9.3 96.955,19.775 R5.1
NetR6_1: R6.1 U11.3 | length 39.2
  Top Layer w0.381: v1(101.65,33.475) 102.725,34.55 R6.1
  Bottom Layer w0.381: U11.3 96.422,13.173 95.552,13.173 94.225,14.5 94.225,29.25 95.62,30.645 98.45,33.475 v1(101.65,33.475)
NetR7_2: R7.2 R8.1 R9.2 | length 16.3
  Top Layer w0.381: R7.2 48.25,38.875 53.674,44.299 R8.1
NetR10_2: R10.2 R11.1 | length 4.9
  Top Layer w0.381: R11.1 R10.2
NetR11_2: R11.2 R12.1 | length 6.1
  Top Layer w0.381: R12.1 28.076,44.363 28.076,50.332 R11.2
NetR12_2: R12.2 R13.1 | length 4.9
  Top Layer w0.381: R12.2 R13.1
NetR13_2: R13.2 R14.1 | length 4.4
  Top Layer w0.381: R13.2 R14.1
NetR16_2: R16.2 R17.2 | length 4.8
  Top Layer w0.381: R16.2 R17.2
NetR17_1: R17.1 R18.1 | length 4.4
  Top Layer w0.381: R17.1 R18.1
NetR19_1: R19.1 U13.3 | length 6.9
  Top Layer w0.381: R19.1 64.975,32.891 65.235,33.15 U13.3
NetR22_2: R22.2 U13.4 | length 8.9
  Top Layer w0.381: U13.4 75.625,33.15 76.325,33.85 R22.2
NetR25_1: R25.1 U14.4 | length 5.1
  Top Layer w0.381: U14.4 64.841,49.337 64.841,44.341 R25.1
NetR29_1: R29.1 U15.4 | length 4.6
  Top Layer w0.381: R29.1 76.387,44.487 76.387,48.938 U15.4@76.425,48.975
NetR30_2: R30.2 R31.1 R32.2 | length 16.3
  Top Layer w0.381: R30.2 48.225,10.15 53.649,15.574 R31.1
NetR33_2: R33.2 R34.1 | length 4.9
  Top Layer w0.381: R34.1 R33.2
NetR34_2: R34.2 R35.1 | length 6.1
  Top Layer w0.381: R35.1 28.051,15.637 28.051,21.606 R34.2
NetR35_2: R35.2 R36.1 | length 4.9
  Top Layer w0.381: R35.2 R36.1
NetR36_2: R36.2 R37.1 | length 4.4
  Top Layer w0.381: R36.2 R37.1
NetR39_2: R39.2 R40.2 | length 4.8
  Top Layer w0.381: R39.2 R40.2
NetR40_1: R40.1 R41.1 | length 4.4
  Top Layer w0.381: R40.1 R41.1
NetR42_1: R42.1 U17.3 | length 6.9
  Top Layer w0.381: R42.1 64.95,4.165 65.209,4.425 U17.3
NetR45_2: R45.2 U17.4 | length 8.9
  Top Layer w0.381: U17.4 75.6,4.425 76.3,5.125 R45.2
NetR48_1: R48.1 U18.4 | length 5.1
  Top Layer w0.381: U18.4 64.816,20.612 64.816,15.616 R48.1
NetR52_1: R52.1 U19.4 | length 4.6
  Top Layer w0.381: R52.1 76.362,15.762 76.362,20.212 U19.4@76.4,20.25
NetU4_3: U4.3 U11.4 | length 43.6
  Bottom Layer w0.381: U11.4 98.38,10.505 99.475,11.6 99.475,14.475 98.7,15.25 96.2,15.25 95.3,16.15 95.3,22.55 96.5,23.75 99.2,23.75 101.875,26.425 101.875,30.35 103.475,31.95 103.475,36.525 102.28,37.72 U4.3
NetU7_3: U7.3 U9.4 | length 18.2
  Top Layer w0.381: U9.4 96.55,22.77 96.55,24.775 v1(96.575,24.8) ; U7.3 96.825,32.275 v1(98.175,30.925)
  Bottom Layer w0.381: v1(96.575,24.8) 98.7,24.8 100.55,26.65 100.55,28.5 98.175,30.875 v1(98.175,30.925)
NetU12_5: U12.5 U12.6 | length 1.3
  Top Layer w0.381: U12.5 U12.6
NetU16_5: U16.5 U16.6 | length 1.3
  Top Layer w0.381: U16.5 U16.6
Opt1_P: U7.2 U12.7 U13.1 | length 44.9
  Top Layer w0.381: U12.7 59.285,38.96 61.165,38.96 v1(61.175,38.95) ; v1(64.318,38.181) 65.169,38.181 68.3,35.05 U13.1 71.645,35.15 71.645,36.17 v1(71.725,36.25) ; v1(68.908,31.849) 70.282,30.475 v1(71.4,30.475) ; v1(81.65,34.225) 83.694,36.269 84.335,36.269 84.571,36.505 U7.2
  Bottom Layer w0.381: v1(61.175,38.95) 61.944,38.181 v1(64.318,38.181) ; v1(68.908,31.849) 71.725,34.666 v1(71.725,36.25) ; v1(71.4,30.475) 71.48,30.555 71.48,30.814 71.574,30.908 71.574,31.005 72.919,32.35 74.75,32.35 76.725,30.375 78.65,30.375 79.4,31.125 79.4,31.975 v1(81.65,34.225)
Opt1_S: U9.2 U16.7 U17.1 | length 41.4
  Top Layer w0.381: U16.7 59.26,10.235 61.14,10.235 v1(61.15,10.225) ; v1(64.293,9.455) 65.144,9.455 68.275,6.325 U17.1 ; v1(78.525,14.275) 80.3,14.275 86.23,20.205 U9.2
  Bottom Layer w0.381: v1(61.15,10.225) 61.919,9.455 v1(64.293,9.455) 69.113,14.275 v1(78.525,14.275)
Opt2_P: U4.2 U13.6 | length 30.4
  Top Layer w0.381: v1(72.975,30.7) 72.975,30.813 72.775,31.013 72.775,34.636 73.172,35.034 74.039,35.034 U13.6
  Bottom Layer w0.381: v1(72.975,30.7) 72.975,30.65 74.375,29.25 78.775,29.25 80.4,30.875 87.15,30.875 89.525,33.25 89.525,37.25 89.055,37.72 U4.2
Opt2_S: U11.2 U17.6 | length 17
  Top Layer w0.381: v1(74.025,7.875) 74.027,7.873 74.027,6.327 U17.6
  Bottom Layer w0.381: v1(74.025,7.875) 75.062,7.875 80.232,13.045 U11.2
Opt3_Out_P: R25.2 U5.2 | length 28.3
  Top Layer w0.381: R25.2 62.683,43.017 63.1,42.6 67.8,42.6 v1(67.85,42.55) ; v1(80.35,46.425) 85.25,46.425 86.195,45.48 U5.2
  Bottom Layer w0.381: v1(67.85,42.55) 71.725,46.425 v1(80.35,46.425)
Opt3_Out_S: R48.2 U8.2 | length 26.9
  Top Layer w0.381: R48.2 62.658,14.317 63.175,13.8 71.625,13.8 72.525,12.9 85.275,12.9 86.245,11.93 U8.2
Opt4_Out_P: R29.2 U6.2 | length 17.7
  Top Layer w0.381: R29.2 74.15,42.938 74.525,42.563 v1(74.525,42.45)
  Bottom Layer w0.381: v1(74.525,42.45) 75.675,41.3 81.075,41.3 86.1,46.325 U6.2@87.55,46.325
Opt4_Out_S: R52.2 U10.2 | length 20.4
  Top Layer w0.381: R52.2 v1(74.125,18)
  Bottom Layer w0.381: v1(74.125,18) 80.6,24.475 85.625,24.475 87.36,22.74 U10.2
REF_1: R27.1 R28.2 R50.1 R51.2 U15.3 U19.3 | length 49.6
  Top Layer w0.381: R28.2 70.75,44.913 71.225,44.438 v1(71.225,44.325) ; R51.2@70.92,21.25 72.05,21.25 72.725,20.575 U19.3 75.127,20.575 75.35,20.798 75.35,24.2 74.298,25.252 74.298,26.127 R50.1 74.237,26.312 74.237,28.087 75.766,29.616 77.166,31.015 77.202,31.015 77.412,31.225 v1(77.525,31.225) ; R28.2@70.945,49.975 72.075,49.975 72.75,49.3 75.152,49.3 75.375,49.523 75.375,52.275 74.2,53.45 R27.1
  Bottom Layer w0.381: v1(71.225,44.325) 71.231,44.319 71.231,43.719 77.525,37.425 v1(77.525,31.225)
REF_2: R23.1 R24.2 R46.1 R47.2 U14.3 U18.3 | length 50.8
  Top Layer w0.381: R47.2 59.834,21.67 60.85,20.654 U18.3 62.734,20.814 63.214,20.814 63.65,21.25 63.65,23.3 62.2,24.75 R46.1 61.225,26.1 v1(59.95,27.375) ; R24.2 59.859,50.395 60.875,49.379 U14.3 ; v1(60.85,44.975) 60.93,45.055 60.93,45.78 62.599,47.449 U14.3 ; R23.1 62.225,53.475 63.675,52.025 63.675,49.975 63.239,49.539 62.759,49.539 U14.3
  Bottom Layer w0.381: v1(59.95,27.375) 58.3,29.025 58.3,42.375 60.85,44.925 v1(60.85,44.975)
Sgn_In: J3.2 U4.4 U5.4 U6.4 U7.4 U8.4 U10.4 | length 100.6
  Top Layer w0.381: v1@94.425,43.95 94.425,46.7 95.727,48.002 96.707,48.002 U5.4 ; v1(96.45,16.775) 96.487,16.738 96.487,14.507 96.52,14.475 95.375,14.475 94.425,15.425 v1(94.425,35.2) 94.425,38.045 95.425,39.045 U7.4
  Bottom Layer w0.381: v1(94.425,35.2) 96.805,35.2 U4.4 ; v1(96.45,16.775) 96.505,16.83 96.505,18.665 U10.4 96.989,19.15 108.225,19.15 110.6,21.525 110.6,28.368 108.915,30.053 107.422,30.053 106.325,31.15 106.325,43.775 101.175,48.925 96.248,48.925 94.45,47.127 v1(94.45,43.95) 96.695,43.95 U6.4
Sgn_Out: J3.3 R5.2 R6.2 U5.3 U6.3 U8.3 U10.3 | length 69.5
  Top Layer w0.381: U8.3 98.93,11.93 105.65,18.65 105.65,21.25 104.925,21.975 R5.2 100,21.975 v1(99.275,21.25) ; U5.3 v1(99.08,45.48) 100.6,47 R6.2@102.991,47
  Bottom Layer w0.381: U10.3 96.57,21.25 v1(99.275,21.25) 104.875,26.85 ; U6.3 99.225,46.545 ; v1(99.08,45.48) 99.132,45.532 99.132,46.452 99.225,46.545 ; J3.3 104.875,26.85 ; 99.225,46.545 100.93,46.545 104.875,42.6 104.875,26.85
pads on no net: J1.A J2.A J3.A

## Polygon pours and split planes (outlines as drawn)
"DC/DC GND" on Top Layer "NONET_L-01_P-001" (solid, pour order 1): 117,59 93.85,59 93.85,0 117,0
"DC/DC GND" on Bottom Layer "NONET_L-01_P-001" (solid, pour order 0): 117,59 93.85,59 93.85,0 117,0

## Silkscreen, mask and mechanical layers (free items; w line width, h text height)
Mechanical 1:
  the board outline again, w0.1